# Altium PCB ups.PcbDoc
Units mil, origin at the board's own origin, x right, y up, seen from the top; angles counter-clockwise.
Board outline 985 x 1575 mil, 2 copper layers (Top Layer, Bottom Layer); 14 components, 7 nets, 47 pads, 42 vias.
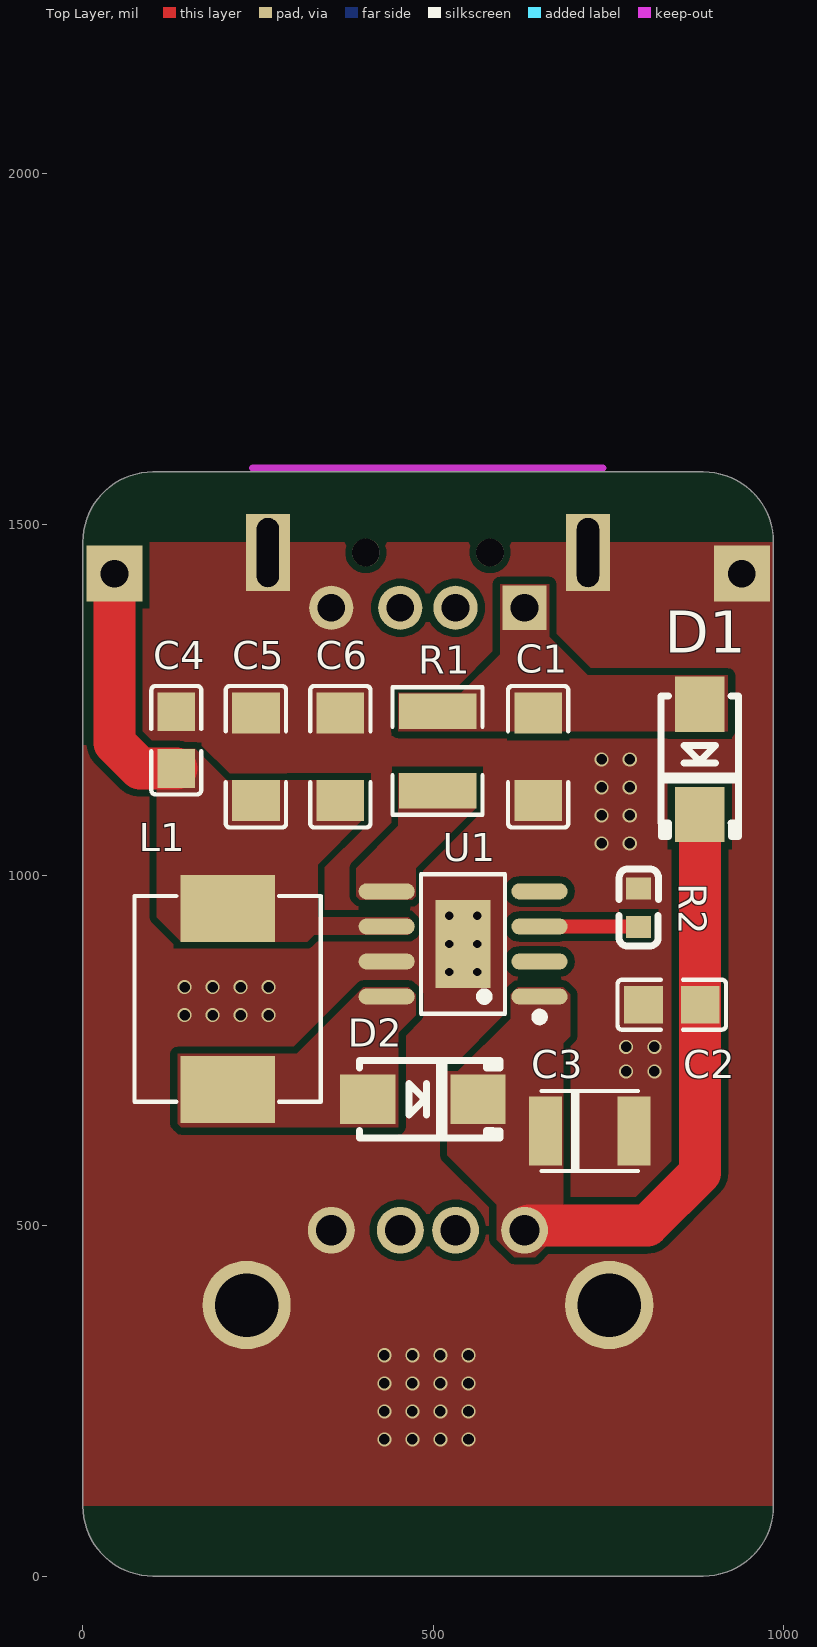
[diagram p0: Top Layer view]
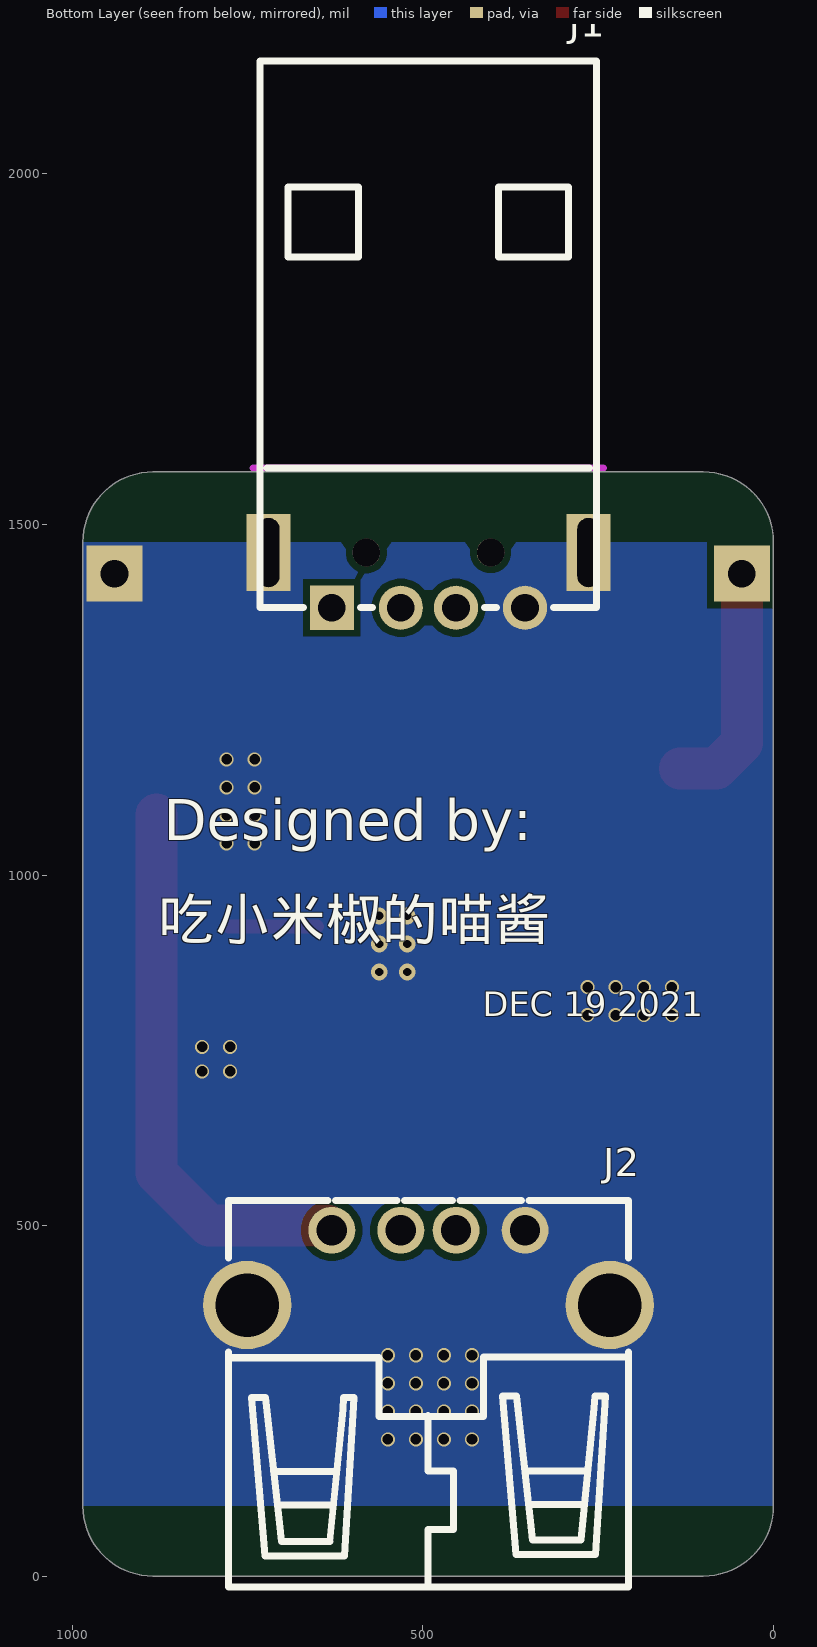
[diagram p1: Bottom Layer view, seen from below]

## Layer stack, top to bottom
Top Solder: solder mask 0.4, Solder Resist, Dk 3.5
Top Layer: signal copper 1.4
Dielectric 1: dielectric 12.6, FR-4, Dk 4.8
Bottom Layer: signal copper 1.4
Bottom Solder: solder mask 0.4, Solder Resist, Dk 3.5

## Board outline
0,100 0,1475 cw(c100,1475) 100,1575 885,1575 cw(c885,1475) 985,1475 985,100 cw(c885,100) 885,0 100,0 cw(c100,100)

## Design rules (kind name [scope] priority, off if disabled: settings)
Clearance [All] p1: gap=10 ignorepadtopadclearanceinfootprint=FALSE except(0: Arc-Hole Track-Hole SMDPad-Hole THPad-Hole Via-Hole Fill-Hole Poly-Hole Region-Hole Text-Hole)
PolygonConnect [All] p1: connectstyle=Direct reliefconductorwidth=10 reliefentries=4 polygonreliefangle="90 Angle" airgapwidth=10
RoutingVias [All] p1: holewidth=28 width=50 viastyle="Through Hole" minholewidth=28 minwidth=50 maxholewidth=28 maxwidth=50
SolderMaskExpansion [All] p1: expansion=4 istentingtop=FALSE
Width [All] p1: maxlimit=60 minlimit=10 preferedwidth=40
30 further rules are at their usual default settings.

## Components (designator, comment, footprint, x,y, rotation, side; value= is the part's Value field where it differs from the comment)
C1 "10UF" 1206 649.41,1168.69 r270 top
C2 "0.1UF" 0805 840,815 r180 top
C3 "100UF" CAP-SMD-3.5X2.8 723,635 r0 top
C4 "0.1UF" 0805 133.17,1192.31 r90 top
C5 "22UF" 1206 246.83,1168.69 r90 top
C6 "22UF" 1206 367.15,1168.69 r90 top
D1 "SBD" SMA 880,1165 r90 top
D2 "SBD" SMA 485,680 r180 top
J1 "USB-A" USB-A-MALE-DD 492.13,1420.63 r0 bottom
J2 "USB-A" USB-A-FEMALE-DD 492.13,440 r180 bottom locked
L1 "10UH" IND-0630 206.35,823.32 r90 top
R1 "0.3R" 1210 505.89,1176.93 r90 top
R2 "2K" 0603 792.65,953.31 r270 top
U1 "TP5410" ESOP-8 542.29,901.63 r90 top

## Footprints (in the part's own frame and the unit in brackets; to place one, negate y for a bottom-side part, rotate by r counter-clockwise, add the part's x,y. Pads: shape width x height; smd on the part's side, far side on the other; paste and mask are expansions set on the pad)
0603 [mm]
  rect 0.8x0.9 smd: 1(-0.7,0) 2(0.7,0)
  silkscreen extent -1.41,-0.71 1.39,0.72
0805 [mm]
  rect 1.41x1.35 smd: 1(-1.03,0) 2(1.03,0)
  silkscreen extent -1.96,-0.9 1.96,0.9
1206 [mm]
  rect 1.485x1.728 smd: 1(-1.593,0) 2(1.593,0)
  silkscreen extent -2.56,-1.09 2.56,1.09
1210 [mil]
  rect 50.49x110.55 smd: 1(-56.74,0) 2(56.74,0)
  silkscreen extent -91,-64 91,64
CAP-SMD-3.5X2.8 [mm]
  rect 1.2x2.5 smd: 1(-1.6,0) 2(1.6,0)
  silkscreen extent -1.75,-1.45 1.75,1.45
ESOP-8 [mm]
  oval 0.574x2.038 smd: 1(-1.905,-2.769) 2(-0.635,-2.769) 3(0.635,-2.769) 4(1.905,-2.769) 5(1.905,2.769) 6(0.635,2.769) 7(-0.635,2.769) 8(-1.905,2.769)
  rect 3.2x2 smd: 9(0,0)
  silkscreen extent -2.79,-2.92 2.53,1.52
IND-0630 [mm]
  rect 2.424x3.42 smd: 1(3.278,0) 2(-3.278,0)
  silkscreen extent -3.73,-3.38 3.73,3.38
SMA [mm]
  rect 2x1.8 smd: 1(-2,0) 2(2,0)
  silkscreen extent -2.79,-1.4 2.3,1.4
USB-A-FEMALE-DD [mm]
  round 1.7 hole 1.1: 1(-3.5,1.355) 2(-1,1.355) 3(1,1.355) 4(3.5,1.355)
  round 3.2 hole 2.3: 5(-6.57,-1.355) 6(6.57,-1.355)
  silkscreen extent -7.25,-11.57 7.25,2.43
USB-A-MALE-DD [mm]
  rect 1.6x1.6 hole 1: 1(3.5,1)
  round 1.6 hole 1: 2(1,1) 3(-1,1) 4(-3.5,1)
  rect 1.6x2.8 hole 0.8 slot 2.5 at 90 deg: 5(5.8,-1) 6(-5.8,-1)
  round 1 hole 1 unplated: ""(-2.25,-1) ""(2.25,-1)
  Keep-Out Layer lines w0.254: -6.35,-4.064 6.35,-4.064
  silkscreen extent -6.1,-18.81 6.1,1

## Part data
C1 C2 C4 C5 C6: library part CAP, "Capacitor"
C3: library part CAP-ELC
D1 D2: "SchottkyBarrierDiode"
L1: library part IND, "Inductor"
R1 R2: library part RES, "Resistor"
U1: library part TP5400

## Free pads (board coordinates)
  rect 80x80 hole 39.37: 4(45,1430) 4(940,1430)

## Via types
v1: diameter 20, hole 15, Top Layer to Bottom Layer, 36 vias
v2: diameter 24, hole 12, Top Layer to Bottom Layer, 6 vias

## Nets (pads, with @x,y where several pads share a name; then routed paths per layer and width w, separated by ;. In a path a pad name is that pad's centre, name@x,y a point inside that pad or via, vN(x,y) a via of type N, cw(c..) or ccw(c..) an arc to the next point about the centre after c; other vN are vias at no path point)
+5: C1.1 D1.2 J1.1 R1.2
GND: C1.2 C2.2 C3.2 C4.2 C5.2 C6.2 J1.4 J1.5 J1.6 J2.4 J2.5 J2.6 pad.4@940,1430 R2.1 U1.7 U1.9
  other v1: 430,195 470,195 510,195 550,195 430,235 470,235 510,235 550,235 430,275 470,275 510,275 550,275 430,315 470,315 510,315 550,315 775,720 815,720 775,755 815,755 145,800 185,800 225,800 265,800 145,840 185,840 225,840 265,840 740,1045 780,1045 740,1085 780,1085 740,1125 780,1125 740,1165 780,1165
  other v2: 522.29,861.63 562.29,861.63 522.29,901.63 562.29,901.63 522.29,941.63 562.29,941.63
NetC2_1: C2.1 C3.1 D1.1 D2.1 J2.1 U1.1 | length 795.2
  Top Layer w30: J2.1 J2.1@636.57,500
  Top Layer w60: J2.1@636.57,500 805,500 880,575 D1.1
NetC4_1: C4.1 C5.1 C6.1 L1.1 pad.4@45,1430 U1.6 | length 345.1
  Top Layer w60: pad.4@45,1430 45,1188.09 81.33,1151.76 C4.1
NetD2_2: D2.2 L1.2 U1.8
NetR1_1: R1.1 U1.5
NetR2_2: R2.2 U1.3 | length 125.3
  Top Layer w20: U1.3 R2.2@776.57,926.63
pads on no net: J1. J1.2 J1.3 J2.2 J2.3 U1.2 U1.4

## Polygon pours and split planes (outlines as drawn)
GND on Top Layer "NONET_L-01_P-001" (solid, remove dead copper, pour order 12): 0,1475 985,1475 985,100 0,100
NetC4_1 on Top Layer "NETC4_1_L01_P001" (solid, remove dead copper, pour order 1): 140,905 320,905 330,915 465,915 470,920 470,935 465,940 335,940 335,1015 400,1080 400,1135 205,1135 160,1180 105,1180 105,940
NetC2_1 on Top Layer "NETC2_1_L01_P008" (solid, remove dead copper, pour order 8): 520,720 520,600 590,530 590,480 615,455 645,455 685,495 685,760 695,770 695,830 685,840 620,840 610,830 610,795 535,720
NetD2_2 on Top Layer "NETD2_2_L01_P007" (solid, remove dead copper, pour order 7): 135,745 305,745 400,840 465,840 475,830 475,800 450,775 450,640 140,640 135,645
+5 on Top Layer "+5_L01_P003" (solid, remove dead copper, pour order 3): 640,1340 665,1340 720,1285 920,1285 920,1205 640,1205
+5 on Top Layer "+5_L01_P002" (solid, remove dead copper, pour order 2): 450,1260 450,1205 685,1205 685,1275 665,1295 665,1415 595,1415 595,1315 540,1260
NetR1_1 on Top Layer "NETR1_1_L01_P000" (solid, remove dead copper, pour order 0): 450,1145 450,1070 390,1010 390,970 395,965 470,965 475,970 475,1010 560,1095 560,1145
GND on Bottom Layer "GND_L02_P010" (solid, remove dead copper, pour order 10): 0,1475 985,1475 985,100 0,100

## Silkscreen, mask and mechanical layers (free items; w line width, h text height)
Bottom Overlay:
  text "Designed by:" at 870,1030.13 h100
  text "吃小米椒的喵酱" at 877.5,888.95 h100
  text "DEC 19 2021" at 415,787.32 h60
Mechanical 1:
  the board outline again, w10